# EAGLE board itrope-serial-Slave-v01 (EAGLE 7.2.0)
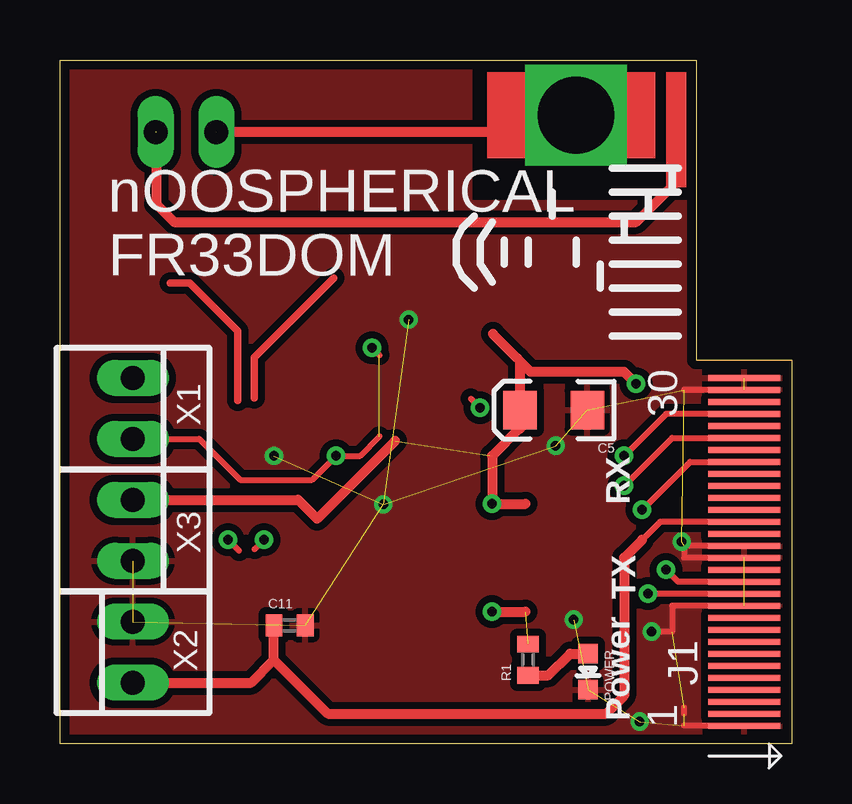
[diagram p0: board, top side]
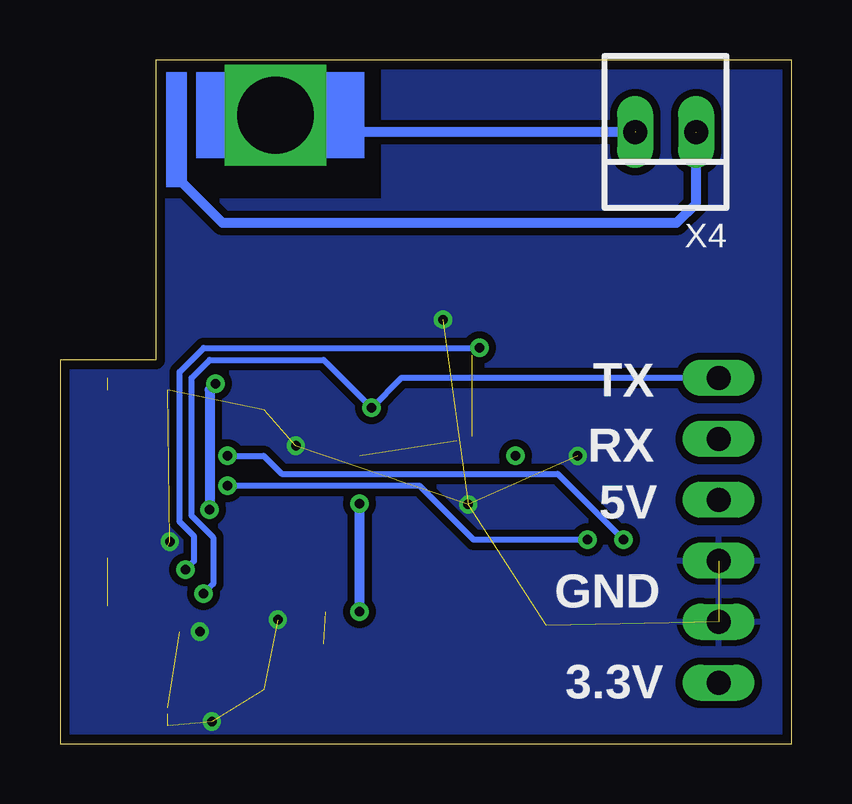
[diagram p1: board, bottom side, seen from below]

Size 30.48 x 28.5 mm. Coordinates in mm from the lower left corner, seen from the top.
Outline: 0,28.5 26.5,28.5 26.5,16 30.48,16 30.48,0 0,0 0,28.5
Copper layers (1*16): Top 0.0356mm / dielectric 1.5011mm / Bottom 0.0356mm
Design rules "LaenPCBOrder": minimum track width 6mil, minimum drill 13mil, track to track 6mil, track to pad 6mil, pad to pad 6mil, via to via 6mil, smd to smd 6mil, copper to edge 15mil, drill to drill 6mil, minimum pad ring 7mil, minimum via ring 7mil, stop-mask expansion 3mil, vias tented up to drill 0mil, thermal gap 10mil
Net classes: 1 vcc: width 0.203 mm

## Footprints (pad centres in the part's own frame; a part is rotated, then mirrored left to right if it is on the bottom)
EIA3216 = smd 1.4 x 1.6: A 1.4,0; C -1.4,0
C0402 = smd 0.7 x 0.9: 1 -0.65,0; 2 0.65,0
SOT223 = smd 1.219 x 2.235: 1 -2.311,-3.099; 2 0,-3.099; 3 2.311,-3.099 | smd 3.6 x 2.2: 4 0,3.099
78LXX = drill 0.813 octagon: GND 0,1.905; IN 1.27,0; OUT -1.27,0
30PINEDGE = smd 0.25 x 3: P$1 7.25,1.5; P$2 6.75,1.5; P$3 6.25,1.5; P$4 5.75,1.5; P$5 5.25,1.5; P$6 4.75,1.5; P$7 4.25,1.5; P$8 3.75,1.5; P$9 3.25,1.5; P$10 2.75,1.5; P$11 2.25,1.5; P$12 1.75,1.5; P$13 1.25,1.5; P$14 0.75,1.5; P$15 0.25,1.5; P$16 -0.25,1.5; P$17 -0.75,1.5; P$18 -1.25,1.5; P$19 -1.75,1.5; P$20 -2.25,1.5; P$21 -2.75,1.5; P$22 -3.25,1.5; P$23 -3.75,1.5; P$24 -4.25,1.5; P$25 -4.75,1.5; P$26 -5.25,1.5; P$27 -5.75,1.5; P$28 -6.25,1.5; P$29 -6.75,1.5; P$30 -7.25,1.5
LED-0603 = smd 0.8 x 0.8: A 0,-0.75; C 0,0.75
SOT23-5 = smd 0.55 x 1.2: 1 -0.95,-1.3; 2 0,-1.3; 3 0.95,-1.3; 4 0.95,1.3; 5 -0.95,1.3
22-23-2021 = drill 1 long: 1 -1.27,0; 2 1.27,0

## Placement (x,y rotation side)
C5  10uF  [EIA3216]  20.57,13.9 180 top
C11  0.1uF  [C0402]  9.57,4.93 0 top
IC1  [SOT223]  38.2,25.3 0 top  (outside the outline)
IC2  [78LXX]  40.8,8.8 0 top  (outside the outline)
J1  JAE-IPOD-EDGECARD  [30PINEDGE]  27,8 270 top
POWER  Red  [LED-0603]  22,3 180 top
R1  330  [C0402]  19.5,3.5 90 top
U$3  V_REG_SOT23-5_EN  [SOT23-5]  40.5,16.8 0 top  (outside the outline)
U$9  CREATIVE_COMMONS  [CREATIVE_COMMONS]  -9.18,-27.14 0 top  (outside the outline)
X1  22-23-2021  [22-23-2021]  3.04,13.97 270 top
X2  22-23-2021  [22-23-2021]  3.04,3.81 90 top
X3  22-23-2021  [22-23-2021]  3.04,8.89 270 top
X4  22-23-2021  [22-23-2021]  5.25,25.5 180 bottom

## Library data of the parts
C5 C11 POWER R1 U$9 = SparkFun
IC1 U$3 = LITTLEBITS
IC2 = v-reg
J1 = con-jae-IPOD-edgecard
X1-X4 = con-molex; MF: MOLEX; MPN: 22-23-2021; OC_FARNELL: 1462926; OC_NEWARK: 25C3832

## Nets
5V [vcc]: C5.A J1.P$23 R1.2 X3.1
+3V3: C11.1 J1.P$18 X2.1
D+: J1.P$27
D-: J1.P$25
GND [vcc]: C5.C C11.2 J1.P$1 J1.P$11 J1.P$15 J1.P$16 J1.P$29 J1.P$30 POWER.C X2.2 X3.2
LEFT: X4.2
N$1: POWER.A R1.1
RIGHT: X4.1
RXD: J1.P$13 X1.2
TXD: J1.P$12 X1.1

## Tracks (layer width: path | path; a pad name or v marks a point on that pad's centre or on a via)
5V  (via drill 0.4)  (2 unrouted)
  Top 0.254: 19.17,15.93 19.05,16.05 | 19.17,13.13 C5.A | v24.25,9.75 26.25,11.75 J1.P$23
  Top 0.406: C5.A 19.17,15.93 19.61,15.5 23.5,15.5 v24,15 | 19.05,16.05 18.03,17.07 | 13.96,12.62 10.71,9.37 9.92,10.16 X3.1 | 19.35,4 R1.2 | 19.4,10 v18,10 18,12 19.13,13.13 19.17,13.13 | v18,5.5 19.4,5.5
  Bottom 0.406: v18,5.5 v18,10 | v24,15 24.25,14.75 v24.25,9.75
+3V3
  Top 0.254: 8.76,5.08 C11.1 | J1.P$18 25,9.25 24.25,8.5
  Top 0.406: X2.1 7.96,2.54 8.92,3.5 | 8.92,3.5 C11.1 | 8.92,3.5 11.16,1.25 22.75,1.25 23.5,2 23.5,7.75 24.25,8.5
D+  (via drill 0.4)
  Top 0.254: v7,8.5 7.46,8.04 | J1.P$27 25.25,13.75 v23.5,12
  Bottom 0.254: v23.5,12 22,12 21.25,11.25 9.75,11.25 v7,8.5
D-  (via drill 0.4)
  Top 0.254: v8.5,8.5 8.11,8.11 | v23.5,10.75 25.5,12.75 J1.P$25
  Bottom 0.254: v8.5,8.5 13.25,8.5 15.5,10.75 v23.5,10.75
GND  (via drill 0.4)  (17 unrouted)
  Top 0.254: 26,1.25 26,1.5 | J1.P$29 26,14.75 | J1.P$16 26,8.25 26,7.75 J1.P$15 | J1.P$11 25.5,5.75 25.5,4.66 v24.65,4.66 | J1.P$1 26,0.75
  other vias: 14.52,17.67 8.91,11.99 13.47,9.97 24.15,0.91 20.65,12.41 21.4,5.16 25.9,8.41
  pour Top (isolate 0.3): 0,0 0,28.4 17.05,28.25 17.05,22.55 27,22.55 27,28.4 30.48,28.4 30.48,0
  pour Bottom (isolate 0.305): 0,0 0,28.4 17,28.3 17,22.6 27,22.6 27,28.4 30.48,28.4 30.48,0
LEFT  (1 unrouted)
  Top 0.406: 18.75,25.5 6.5,25.5
  pour Top: 24.75,28 17.75,28 17.75,24.45 24.75,24.45
N$1
  Top 0.254: POWER.A 21.84,3.87 21.73,3.75
  Top 0.406: R1.1 20.35,2.85 21.25,3.75 POWER.A
N$2
  Top 0.305: 4.6,19.2 5.4,19.2 7.4,17.2 7.4,14.3
N$5
  Top 0.305: 11.4,19.4 8.1,16.1 8.1,14.4
N$6
  Bottom 0.406: 6.5,25.5 20,25.5
N$7
  Bottom 0.406: 4,25.5 4,22.5 4.8,21.7 23.7,21.7 25.6,23.6
N$8  (via drill 3.2)
  other vias: 21.5,26.2
RIGHT  (1 unrouted)
  Top 0.406: 4,25.5 4,22.5 4.75,21.75 24,21.75 25.75,23.5
  pour Top: 26,28 25.25,28 25.25,23.25 26,23.25
  pour Top: 26,28 25.25,28 25.25,23.25 26,23.25
RXD  (via drill 0.4)  (1 unrouted)
  Top 0.254: 13.31,12.81 12.5,12 v11.5,12 10.5,11 7.5,11 5.8,12.7 X1.2 | v13,16.5 13.31,16.19 | J1.P$13 25.75,6.75 v25.25,7.25
  Bottom 0.254: v13,16.5 24.5,16.5 25.5,15.5 25.5,9.25 24.9,8.65 24.9,7.6 v25.25,7.25
TXD  (via drill 0.4)
  Top 0.254: v17.5,14 17.12,14.38 | J1.P$12 v24.5,6.25
  Bottom 0.254: X1.1 16.26,15.24 v17.5,14 19.5,16 24.25,16 25,15.25 25,9.5 24.1,8.6 24.1,6.65 v24.5,6.25
(copper drawn outside any net)
  shapes: Bottom area x2, Top area x2

## Text on the board
tPlace: RX | TX | Power
bPlace: TX | RX | 5V | GND | 3.3V
tNames: nOOSPHERICAL / FR33DOM
Measures: R | L